# EAGLE board PCB (EAGLE 6.5.0)
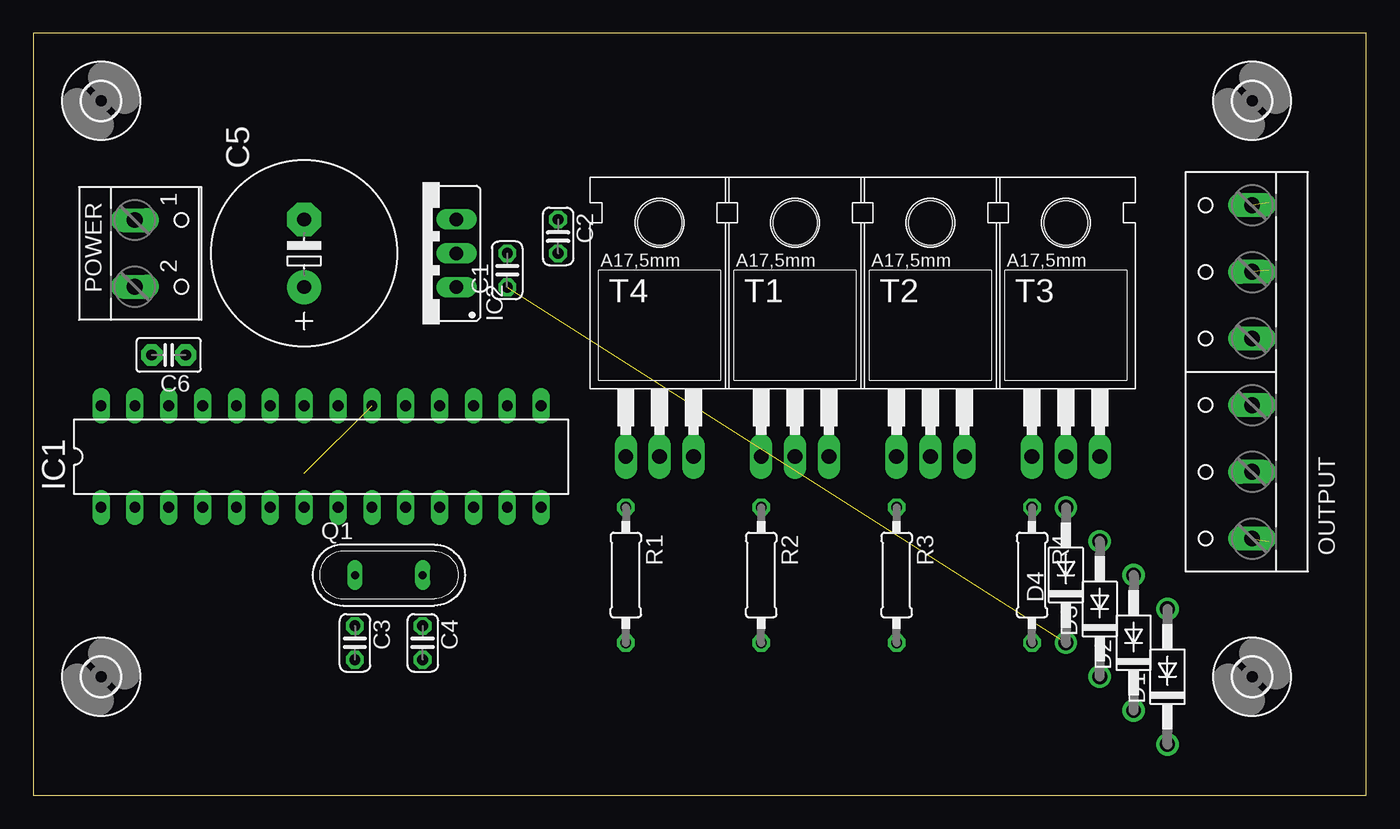
[diagram p0: board, top side]
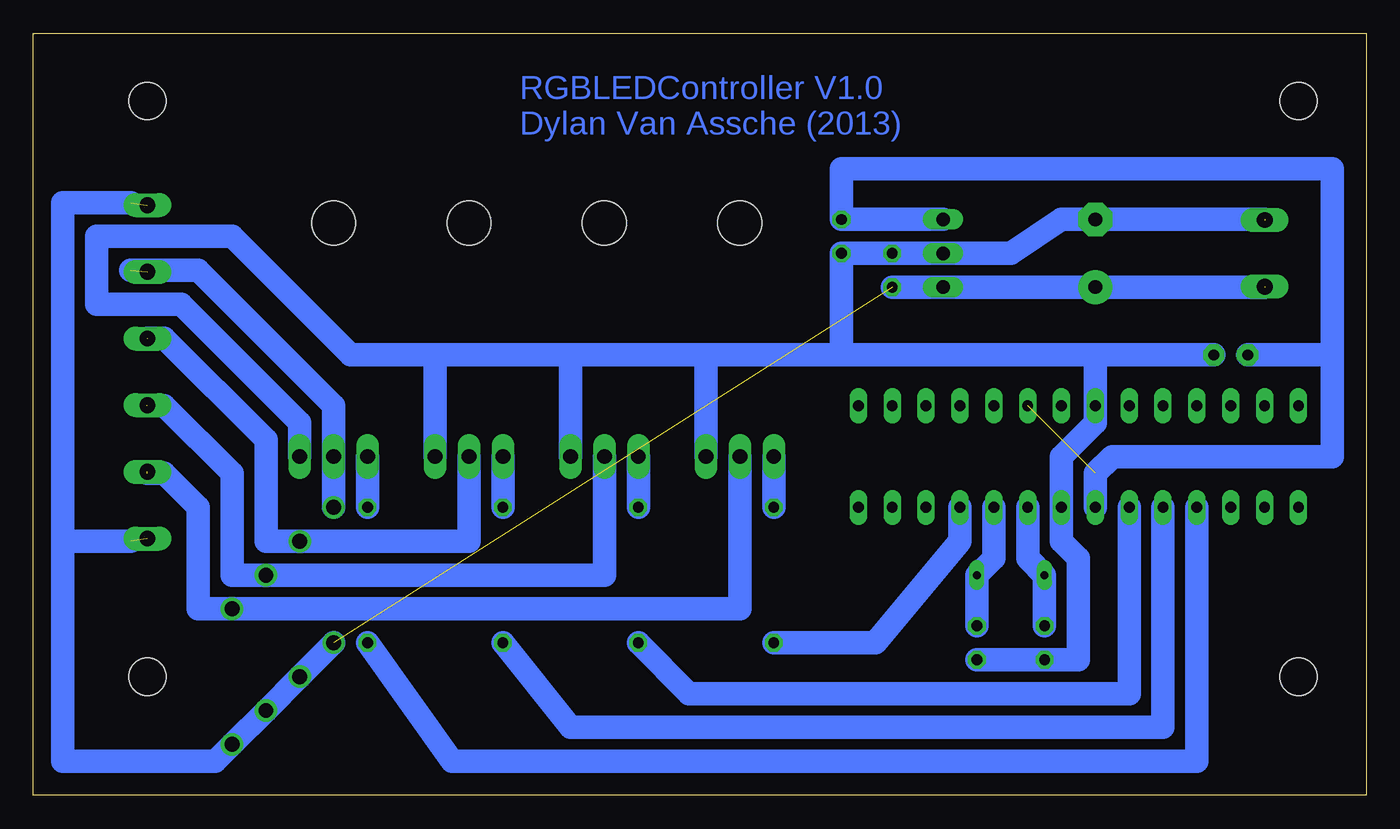
[diagram p1: board, bottom side, seen from below]

Size 100 x 57.14 mm. Coordinates in mm from the lower left corner, seen from the top.
Outline: 0,0 100,0 100,57.14 0,57.14 0,0
Copper layers (1*16): Top 0.035mm / dielectric 1.5mm / Bottom 0.035mm
Design rules "default": minimum track width 10mil, minimum drill 24mil, track to track 8mil, track to pad 8mil, pad to pad 8mil, via to via 8mil, smd to smd 8mil, copper to edge 40mil, drill to drill 8mil, minimum pad ring 10mil, minimum via ring 8mil, stop-mask expansion 4mil, vias tented up to drill 0mil, thermal gap 10mil

## Footprints (pad centres in the part's own frame; a part is rotated, then mirrored left to right if it is on the bottom)
C025-024X044 = drill 0.813 octagon: 1 -1.27,0; 2 1.27,0
E5-13 = drill 1.016 pad 2.54: + -2.54,0 | drill 1.016 pad 2.54 octagon: - 2.54,0
C2.5-2 = drill 0.813 pad 1.6 octagon: 1 -1.27,0; 2 1.27,0
DO41-10 = drill 1.118: A 5.08,0; C -5.08,0
2,8 = hole 2.8: 0,0
DIL28-3 = drill 0.813 long: 1 -16.51,-3.81; 2 -13.97,-3.81; 3 -11.43,-3.81; 4 -8.89,-3.81; 5 -6.35,-3.81; 6 -3.81,-3.81; 7 -1.27,-3.81; 8 1.27,-3.81; 9 3.81,-3.81; 10 6.35,-3.81; 11 8.89,-3.81; 12 11.43,-3.81; 13 13.97,-3.81; 14 16.51,-3.81; 15 16.51,3.81; 16 13.97,3.81; 17 11.43,3.81; 18 8.89,3.81; 19 6.35,3.81; 20 3.81,3.81; 21 1.27,3.81; 22 -1.27,3.81; 23 -3.81,3.81; 24 -6.35,3.81; 25 -8.89,3.81; 26 -11.43,3.81; 27 -13.97,3.81; 28 -16.51,3.81
78XXS = drill 1.016 long: GND 0,-2.54; IN -2.54,-2.54; OUT 2.54,-2.54
W237-136 = drill 1.194 long: 1 -12.5,-1.27; 2 -7.5,-1.27; 3 -2.5,-1.27; 4 2.5,-1.27; 5 7.5,-1.27; 6 12.5,-1.27
W237-102 = drill 1.194 long: 1 -2.5,-1.27; 2 2.5,-1.27
QS = drill 0.61 long: 1 -2.54,0; 2 2.54,0
0207/10 = drill 0.813 octagon: 1 -5.08,0; 2 5.08,0
TO220 = drill 1.118 long: 1 -2.54,-6.35; 2 0,-6.35; 3 2.54,-6.35 | hole 3.302: 0,11.176

## Placement (x,y rotation side)
C1  [C025-024X044]  35.56,39.37 90 top
C2  [C025-024X044]  39.37,41.91 270 top
C3  [C025-024X044]  24.13,11.43 270 top
C4  [C025-024X044]  29.21,11.43 270 top
C5  1000 uF  [E5-13]  20.32,40.64 90 top
C6  [C2.5-2]  10.16,33.02 180 top
D1  1N4004  [DO41-10]  85.09,8.89 90 top
D2  1N4004  [DO41-10]  82.55,11.43 90 top
D3  1N4004  [DO41-10]  80.01,13.97 90 top
D4  1N4004  [DO41-10]  77.47,16.51 90 top
H1  MOUNT-HOLE2.8  [2,8]  91.44,8.89 0 top
H2  MOUNT-HOLE2.8  [2,8]  5.08,8.89 0 top
H3  MOUNT-HOLE2.8  [2,8]  5.08,52.07 0 top
H4  MOUNT-HOLE2.8  [2,8]  91.44,52.07 0 top
IC1  ATMEGA168-PU  [DIL28-3]  21.59,25.4 0 top
IC2  [78XXS]  29.21,40.64 90 top
OUTPUT  [W237-136]  90.17,31.75 90 top
POWER  [W237-102]  8.89,40.64 270 top
Q1  [QS]  26.67,16.51 0 top
R1  1K  [0207/10]  44.45,16.51 270 top
R2  1K  [0207/10]  54.61,16.51 270 top
R3  1K  [0207/10]  64.77,16.51 270 top
R4  1K  [0207/10]  74.93,16.51 270 top
T1  TIP122  [TO220]  57.15,31.75 0 top
T2  TIP122  [TO220]  67.31,31.75 0 top
T3  TIP122  [TO220]  77.47,31.75 0 top
T4  TIP122  [TO220]  46.99,31.75 0 top

## Library data of the parts
C1-C5 R1-R4 = rcl
C6 = capacitor-wima
D1-D4 = diode
H1-H4 = holes
IC1 = Arduino-AVR
IC2 = v-reg
OUTPUT = con-wago-500; MPN: 237-136; OC_FARNELL: unknown; OC_NEWARK: 84K9151
POWER = con-wago-500; MPN: 237-102; OC_FARNELL: unknown; OC_NEWARK: 70K9898
Q1 = special
T1-T4 = transistor-neu-to92

## Nets
GND: C1.2 C2.2 C3.2 C4.2 C5.- C6.1 IC1.8 IC1.22 IC2.GND POWER.1 T1.3 T2.3 T3.3 T4.3
N$1: C1.1 C5.+ D1.C D2.C D3.C D4.C IC2.IN OUTPUT.1 OUTPUT.6 POWER.2
N$2: R4.1 T3.1
N$4: D4.A OUTPUT.5 T3.2
N$5: C4.1 IC1.10 Q1.2
N$6: C3.1 IC1.9 Q1.1
N$7: D3.A OUTPUT.4 T2.2
N$8: D2.A OUTPUT.3 T1.2
N$9: D1.A OUTPUT.2 T4.2
N$10: R3.1 T2.1
N$11: R2.1 T1.1
N$12: R1.1 T4.1
N$13: IC1.4 R4.2
N$14: IC1.5 R3.2
N$15: IC1.6 R2.2
N$16: IC1.11 R1.2
VCC: C2.1 C6.2 IC1.7 IC1.20 IC2.OUT

## Tracks (layer width: path | path; a pad name or v marks a point on that pad's centre or on a via)
GND  (1 unrouted)
  Bottom 1.778: C4.2 C3.2 21.59,10.16 21.59,17.78 22.86,19.05 IC1.8 22.86,25.4 20.32,27.94 IC1.22 20.32,33.02 | 7.62,43.18 C5.- 22.86,43.18 26.67,40.64 IC2.GND C1.2 C2.2 39.37,33.02 | 39.37,33.02 49.53,33.02 | 49.53,33.02 T4.3 | 20.32,33.02 39.37,33.02 | 49.53,33.02 59.69,33.02 | 59.69,33.02 69.85,33.02 | 69.85,33.02 T2.3 | 59.69,33.02 T1.3 | T3.3 80.01,27.94 88.9,36.83 95.25,36.83 95.25,41.91 85.09,41.91 76.2,33.02 69.85,33.02 | C6.1 20.32,33.02
N$1  (4 unrouted)
  Bottom 1.778: D4.C D3.C D2.C D1.C 86.36,2.54 97.79,2.54 97.79,19.05 | 92.71,44.45 97.79,44.45 97.79,19.05 | 97.79,19.05 92.71,19.05 | 7.62,38.1 C5.+ IC2.IN C1.1
N$2
  Bottom 1.778: R4.1 T3.1
N$4  (1 unrouted)
  Bottom 1.778: 92.71,39.37 87.63,39.37 77.47,29.21 T3.2 D4.A
N$5
  Bottom 1.778: C4.1 Q1.2 27.94,17.78 IC1.10
N$6
  Bottom 1.778: C3.1 Q1.1 25.4,17.78 IC1.9
N$7  (1 unrouted)
  Bottom 1.778: T2.2 67.31,19.05 D3.A 82.55,19.05 82.55,26.67 90.17,34.29 91.44,34.29
N$8  (1 unrouted)
  Bottom 1.778: T1.2 57.15,16.51 D2.A 85.09,16.51 85.09,24.13 90.17,29.21 91.44,29.21
N$9  (1 unrouted)
  Bottom 1.778: T4.2 46.99,13.97 D1.A 87.63,13.97 87.63,21.59 90.17,24.13 91.44,24.13
N$10
  Bottom 1.778: R3.1 T2.1
N$11
  Bottom 1.778: R2.1 T1.1
N$12
  Bottom 1.778: R1.1 T4.1
N$13
  Bottom 1.778: IC1.4 12.7,2.54 68.58,2.54 R4.2
N$14
  Bottom 1.778: R3.2 59.69,5.08 15.24,5.08 IC1.5
N$15
  Bottom 1.778: IC1.6 17.78,7.62 50.8,7.62 R2.2
N$16
  Bottom 1.778: IC1.11 30.48,19.05 36.83,11.43 R1.2
VCC  (1 unrouted)
  Bottom 1.778: 2.54,33.02 2.54,46.99 39.37,46.99 C2.1 IC2.OUT | 2.54,33.02 2.54,25.4 19.05,25.4 20.32,24.13 IC1.7 | C6.2 2.54,33.02

## Text on the board
Bottom: RGBLEDController V1.0 / Dylan Van Assche (2013)